# EAGLE board ATTiny85_Breakout (EAGLE 6.4)
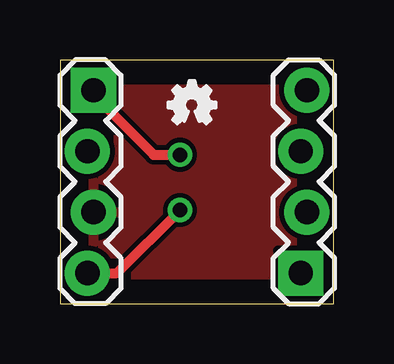
[diagram p0: board, top side]
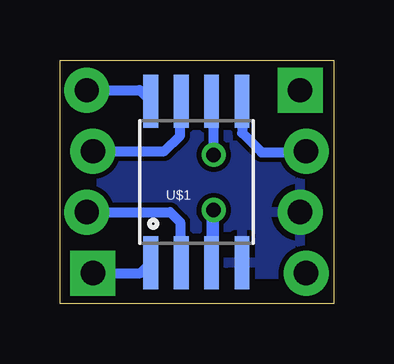
[diagram p1: board, bottom side, seen from below]

Size 11.4 x 10.15 mm. Coordinates in mm from the lower left corner, seen from the top.
Outline: 0,0 11.4,0 11.4,10.15 0,10.15 0,0
Copper layers (1*16): Top 0.035mm / dielectric 1.5mm / Bottom 0.035mm
Design rules "default *": minimum track width 10mil, minimum drill 24mil, track to track 8mil, track to pad 8mil, pad to pad 8mil, via to via 8mil, smd to smd 8mil, copper to edge 40mil, drill to drill 8mil, minimum pad ring 10mil, minimum via ring 8mil, stop-mask expansion 4mil, vias tented up to drill 0.6mm, thermal gap 10mil

## Footprints (pad centres in the part's own frame; a part is rotated, then mirrored left to right if it is on the bottom)
1X04_LOCK = drill 1.016 pad 1.88 square: 1 0,0.127 | drill 1.016 pad 1.88: 2 2.54,-0.127; 3 5.08,0.127; 4 7.62,-0.127
SO08-EIAJ = smd 0.61 x 2.21: 1 -1.905,-3.378; 2 -0.635,-3.378; 3 0.635,-3.378; 4 1.905,-3.378; 5 1.905,3.353; 6 0.635,3.353; 7 -0.635,3.353; 8 -1.905,3.353

## Placement (x,y rotation side)
JP1  [1X04_LOCK]  10.16,1.27 90 top
JP2  [1X04_LOCK]  1.27,8.89 270 top
U$1  ATTINY45  [SO08-EIAJ]  5.71,5.08 0 bottom
U$2  [OSHW_FILLX70_NOTEXT]  4.5,7.5 0 top

## Library data of the parts
JP1 JP2 U$1 = SparkFun
U$2 = ohw-logo

## Nets
GND: JP2.3 U$1.4
PB0: JP2.2 U$1.5
PB1: JP2.1 U$1.6
PB2: JP1.3 U$1.7
PB3: JP1.2 U$1.2
PB4: JP2.4 U$1.3
PB5: JP1.1 U$1.1
VCC: JP1.4 U$1.8

## Tracks (layer width: path | path; a pad name or v marks a point on that pad's centre or on a via)
GND
  pour Top: 0,10.16 0,0 11.43,0 11.43,10.16
  pour Bottom: 0,10.16 0,0 11.43,0 11.43,10.16
PB0
  Bottom 0.406: U$1.5 3.81,7.11 3,6.3 1.19,6.3 JP2.2
PB1  (via drill 0.6)
  Top 0.406: JP2.1 1.4,8.7 3.9,6.2 v5,6.2
  Bottom 0.406: v5,6.2 5,8.35 U$1.6
PB2
  Bottom 0.406: JP1.3 7.05,6.35 6.4,7 6.4,8.38 U$1.7
PB3
  Bottom 0.406: JP1.2 6.81,3.81 6.4,3.4 6.4,1.75 U$1.2
PB4  (via drill 0.6)
  Top 0.406: JP2.4 2.37,1.27 v5,3.9
  Bottom 0.406: 5.08,2.54 5,2.62 v5,3.9 5.08,3.82 U$1.3
PB5
  Bottom 0.406: JP1.1 8.05,1.27 U$1.1
VCC
  Bottom 0.406: JP1.4 8.08,8.89 U$1.8

## Text on the board
_tsilk: PB1 | 5V | PB0 | PB2 | GND | PB3 | C. Thomas Brittain / ATTINYXX Breakout v.9 | PB4 | PB5